# Altium PCB dAir-rose-1.0.0.0.PcbDoc
Units mm, origin at the board's own origin, x right, y up, seen from the top; angles counter-clockwise.
Board outline 93 x 93 mm, 2 copper layers (Top Layer, Bottom Layer), stack 1.671 mm thick; 77 components, 41 nets, 293 pads, 70 vias.
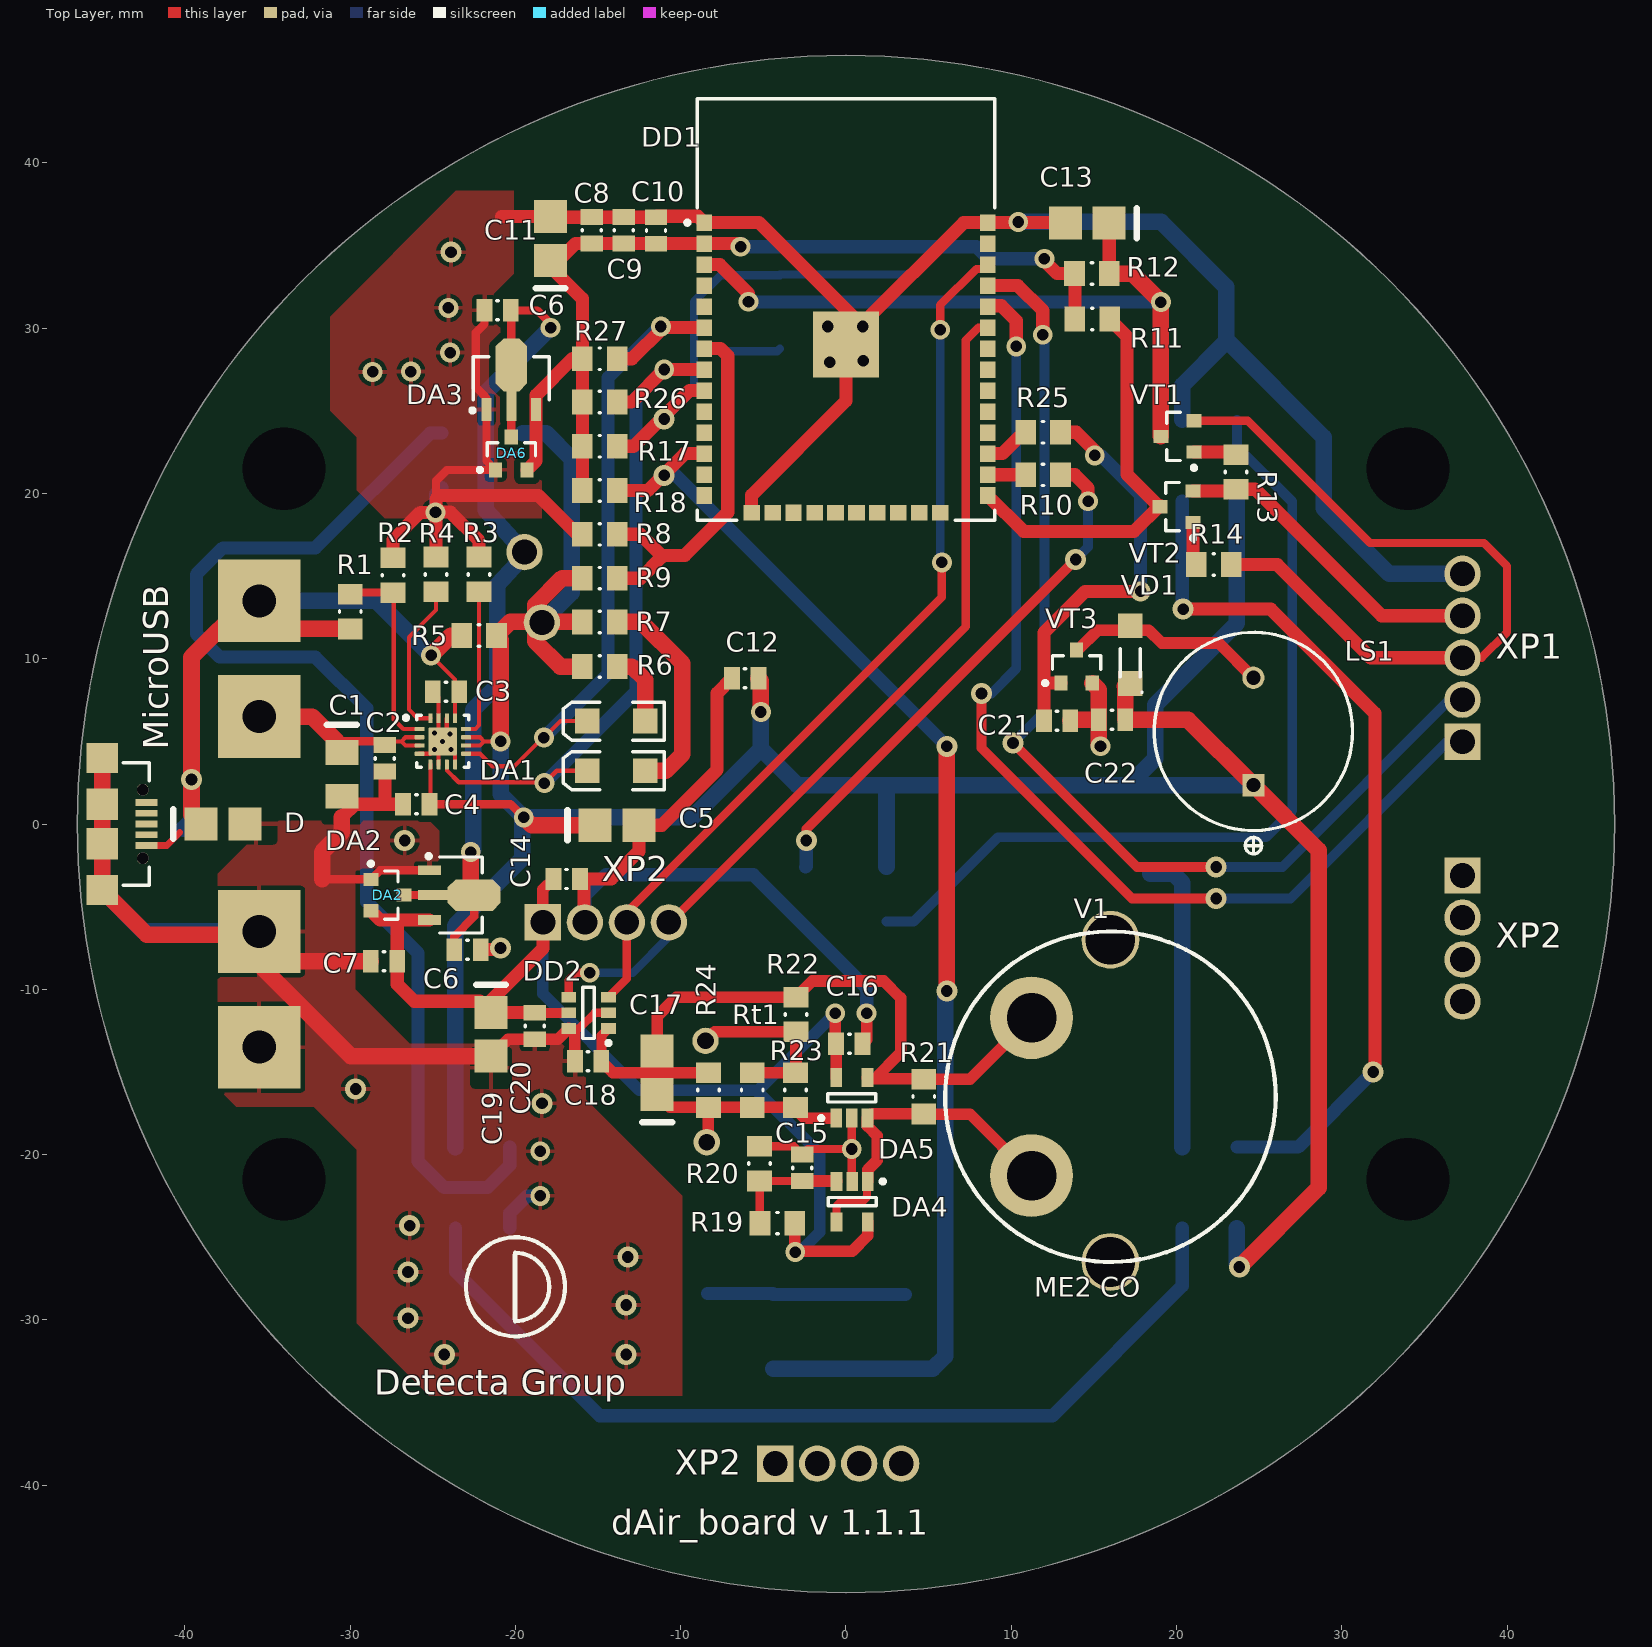
[diagram p0: Top Layer view]
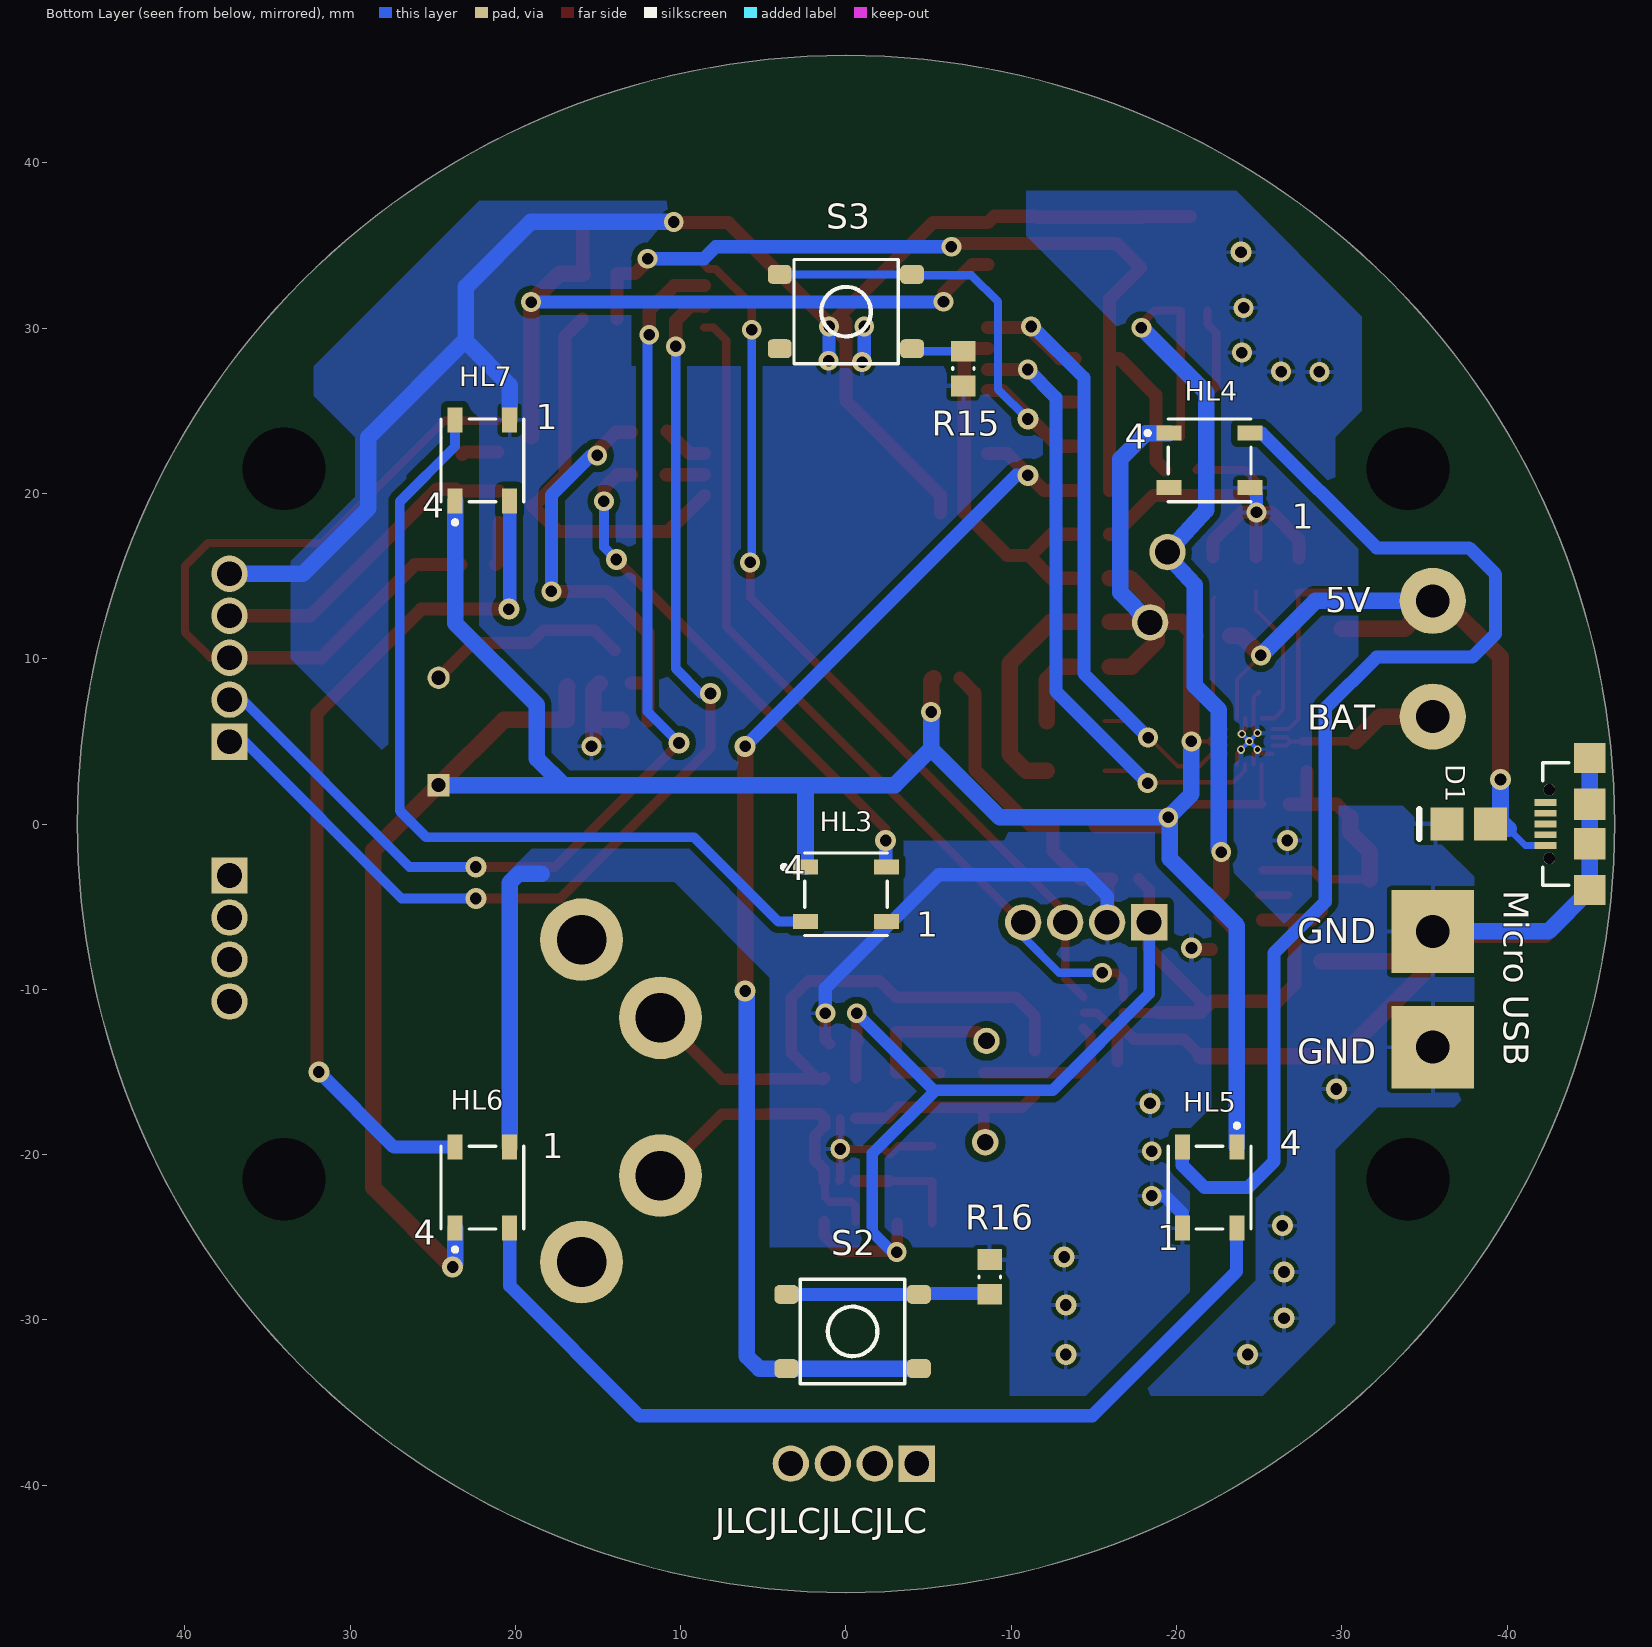
[diagram p1: Bottom Layer view, seen from below]
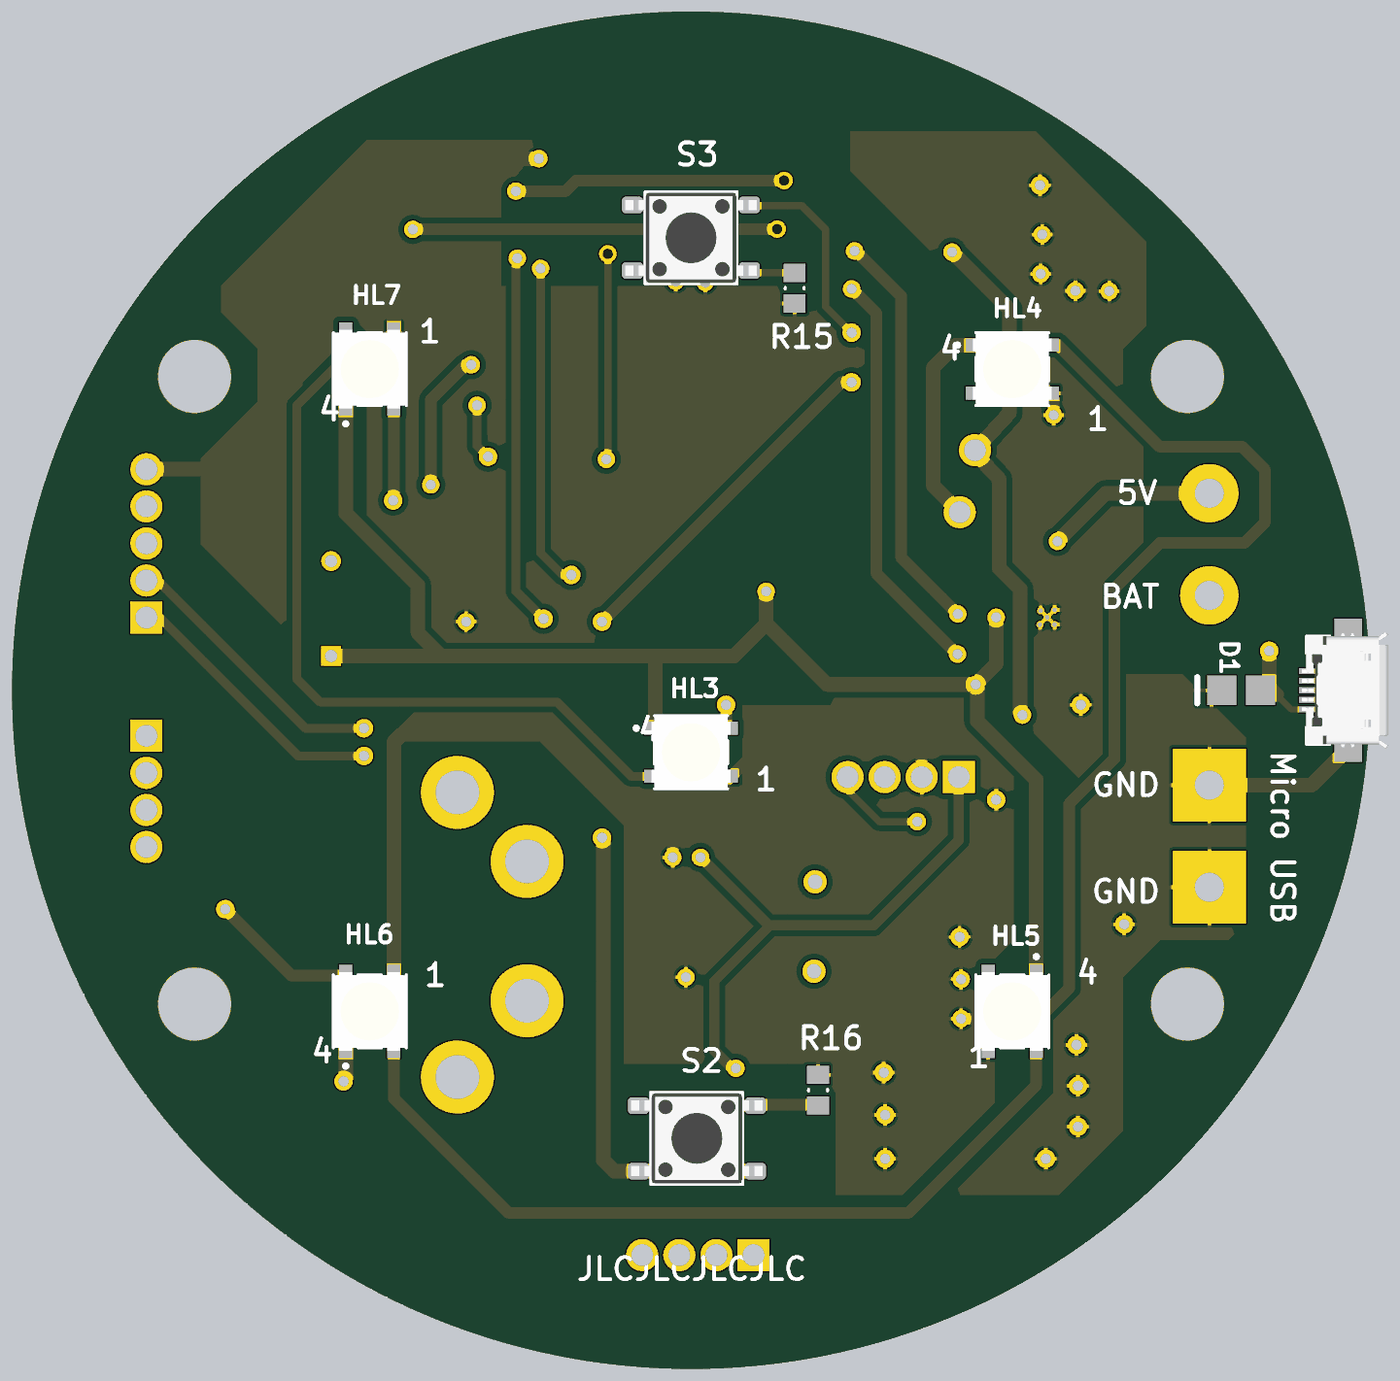
[diagram p2: 3D render of the assembled board from below, using the file's embedded part models]

## Layer stack, top to bottom
Top Solder: solder mask 0.0102, Solder Resist, Dk 3.5
Top Layer: signal copper 0.0356
Dielectric 1: dielectric 1.6, FR-4, Dk 4.8
Bottom Layer: signal copper 0.0356
Bottom Solder: solder mask 0.0102, Solder Resist, Dk 3.5

## Board outline
-46.5,0 ccw(c0,0) 0,-46.5 ccw(c0,0) 46.5,0 ccw(c0,0) 0,46.5 ccw(c0,0)

## Design rules (kind name [scope] priority, off if disabled: settings)
Clearance Polygons [InNet('GND')] p1: gap=0.4 ignorepadtopadclearanceinfootprint=FALSE
Clearance [All] p2: gap=0.254 ignorepadtopadclearanceinfootprint=FALSE
PolygonConnect [All] p1: connectstyle=Relief reliefconductorwidth=0.254 reliefentries=4 polygonreliefangle="90 Angle" airgapwidth=0.254
RoutingVias [All] p1: holewidth=0.711 width=1.27 viastyle="Through Hole" minholewidth=0.711 minwidth=1.27 maxholewidth=0.711 maxwidth=1.27
SolderMaskExpansion [All] p1: expansion=0.102
Width [All] p1: maxlimit=5 minlimit=0.2 preferedwidth=0.254
30 further rules are at their usual default settings.

## Classes and differential pairs
component class dAir: C1 C2 C4 C5 C6 C7 C8 C9 C10 C11 C12 C13 C14 C15 C16 C17 C18 C19 C20 C21 C22 DA1 DA2 DA3 DA4 DA5 DD1 DD2 HL3 HL7 LS1 R1 R2 R3 R4 R5 R6 R7 R8 R9 R10 R11 R12 R13 R14 R17 R18 R19 R20 R21 R22 R23 R24 R25 R26 R27 Rt1 V1 VD1 VT1 VT2 VT3

## Components (designator, comment, footprint, x,y, rotation, side; value= is the part's Value field where it differs from the comment)
C1 "47uF" KEMT-A-3216-18-2_M#1 -30.5,3 r270 top
C2 "4.7uF" CAPC0805(2012)155_L -27.9,3.975 r270 top
C3 "1uF" CAPC0805(2012)155_L -24.2,8 r180 top value=4.7uF
C4 "4.7uF" CAPC0805(2012)155_L -26,1.2 r180 top
C5 "47uF" KEMT-A-3216-18-2_M#2 -13.85,-0.075 r0 top
C6 "1uF" CAPC0805(2012)155_L -22.9,-7.6 r180 top value=4.7uF
C6 "1uF" CAPC0805(2012)155_L -21.075,31.075 r0 top value=4.7uF
C7 "1uF" CAPC0805(2012)155_L -27.95,-8.3 r0 top value=4.7uF
C8 "1uF" CAPC0805(2012)155_L -15.375,35.925 r270 top value=4.7uF
C9 "1nF" CAPC0805(2012)155_L -13.45,35.925 r270 top value=4.7uF
C10 "0.1uF" CAPC0805(2012)155_L -11.5,35.915 r270 top value=4.7uF
C11 "100uF" KEMT-A-3216-18-2_M#2 -17.875,35.425 r90 top
C12 "0.1uF" CAPC0805(2012)155_L -6.1,8.825 r0 top value=4.7uF
C13 "0.1uF" KEMT-A-3216-18-2_M#2 14.6,36.35 r180 top
C14 "0.1uF" CAPC0805(2012)155_L -16.9,-3.325 r180 top value=4.7uF
C15 "0.1uF" CAPC0805(2012)155_L -2.65,-20.8 r270 top value=4.7uF
C16 "1uF" CAPC0805(2012)155_L 0.2,-13.3 r0 top value=4.7uF
C17 "47uF" KEMT-A-3216-18-2_M#2 -11.425,-15.05 r90 top
C18 "0.1uF" CAPC0805(2012)155_L -15.6,-14.35 r180 top value=4.7uF
C19 "10uF" KEMT-A-3216-18-2_M#2 -21.475,-12.725 r270 top
C20 "0.1uF" CAPC0805(2012)155_L -18.825,-12.225 r90 top value=4.7uF
C21 "100 nF" CAPC0805(2012)155_L 12.775,6.25 r0 top value=4.7uF
C22 "1mF" CAPC0805(2012)155_L 16.1,6.3 r180 top value=4.7uF
D "47uF" KEMT-A-3216-18-2_M#2 -37.7,0 r0 top (schematic designator C5)
D1 "47uF" KEMT-A-3216-18-2_M#2 -37.675,0 r180 bottom (schematic designator C5)
DA1 "BQ24075" RGT0016C_V -24.4,5 r0 top
DA2 "" ONSC-SOT-23-3-318-08_V -27.75,-4.3 r0 top
DA2 "HT7530" SOT89_N -23.3,-4.3 r0 top
DA3 "HT7530" SOT89_N -20.25,26.975 r90 top
DA4 "AD8603AUJ-REEL" ADI-UJ-5_M 0.375,-22.85 r270 top
DA5 "AD8603AUJ-REEL" ADI-UJ-5_M 0.35,-16.575 r90 top
DA6 "" ONSC-SOT-23-3-318-08_V -20.25,22.425 r90 top
DD1 "ESP-WROOM-32" OLMX-ESP-WROOM-32 0,27.605 r0 top
DD2 "MCP3421A2T-E/CH" SOT-23-CH6_L -15.575,-11.425 r180 top
HL3 "WS2812B" ADAI-WS2812B_V 0,-4.25 r180 bottom
HL4 "WS2812B" ADAI-WS2812B_V -22,22 r180 bottom
HL5 "WS2812B" ADAI-WS2812B_V -22,-22 r270 bottom
HL6 "WS2812B" ADAI-WS2812B_V 22,-22 r90 bottom
HL7 "WS2812B" ADAI-WS2812B_V 22,22 r90 bottom
LS1 "KPI1410(temporally)" CZCY-CY-12085G-5042-2_V 24.65,5.6 r90 top
"Micro USB" "Comment" 629105136821 -45,0 r90 bottom
MicroUSB "Comment" 629105136821 -45,0 r270 top
R1 "1k" RESC0805(2012)_M -30,12.85 r90 top value="4.30 Ohm"
R2 "1k" RESC0805(2012)_M -27.4,15.05 r90 top value="4.30 Ohm"
R3 "1k" RESC0805(2012)_M -22.2,15.1 r90 top value="4.30 Ohm"
R4 "1k" RESC0805(2012)_M -24.8,15.1 r90 top value="4.30 Ohm"
R5 "0" RESC0805(2012)_M -22.2,11.4 r180 top value="4.30 Ohm"
R6 "1k" RESC0805(2012)_M -14.9,9.525 r0 top value="4.30 Ohm"
R7 "1k" RESC0805(2012)_M -14.9,12.225 r0 top value="4.30 Ohm"
R8 "470k" RESC0805(2012)_M -14.9,17.525 r0 top value="4.30 Ohm"
R9 "100k" RESC0805(2012)_M -14.9,14.875 r180 top value="4.30 Ohm"
R10 "470" RESC0805(2012)_M 11.925,21.125 r180 top value="4.30 Ohm"
R11 "10k" RESC0805(2012)_M 14.9,30.55 r180 top value="4.30 Ohm"
R12 "10k" RESC0805(2012)_M 14.875,33.3 r180 top value="4.30 Ohm"
R13 "10k" RESC0805(2012)_M 23.6,21.3 r270 top value="4.30 Ohm"
R14 "10k" RESC0805(2012)_M 22.25,15.7 r0 top value="4.30 Ohm"
R15 "470" RESC0805(2012)_M -7.1,27.55 r270 bottom value="4.30 Ohm"
R16 "470" RESC0805(2012)_M -8.7,-27.4 r90 bottom value="4.30 Ohm"
R17 "47k" RESC0805(2012)_M -14.9,22.85 r180 top value="4.30 Ohm"
R18 "47k" RESC0805(2012)_M -14.9,20.175 r180 top value="4.30 Ohm"
R19 "1M" RESC0805(2012)_M -4.15,-24.15 r0 top value="4.30 Ohm"
R20 "150k" RESC0805(2012)_M -5.225,-20.55 r270 top value="4.30 Ohm"
R21 "200" RESC0805(2012)_M 4.7,-16.5 r90 top value="4.30 Ohm"
R22 "120k" RESC0805(2012)_M -3.025,-11.525 r270 top value="4.30 Ohm"
R23 "100k" RESC0805(2012)_M -3.05,-16.1 r270 top value="4.30 Ohm"
R24 "100" RESC0805(2012)_M -8.325,-16.1 r90 top value="4.30 Ohm"
R25 "470" RESC0805(2012)_M 11.925,23.7 r180 top value="4.30 Ohm"
R26 "47k" RESC0805(2012)_M -14.9,25.525 r0 top value="4.30 Ohm"
R27 "47k" RESC0805(2012)_M -14.9,28.15 r0 top value="4.30 Ohm"
Rt1 "47k" RESC0805(2012)_M -5.675,-16.1 r270 top value="4.30 Ohm"
S2 "Comment" DIPT-DTSM-6_V -0.4,-30.7 r180 bottom
S3 "Comment" DIPT-DTSM-6_V 0,31 r0 bottom
V1 "ME2 CO" "ME2 CO" 16,-16.5 r315 top locked
VD1 "LL4148" INF-SOD323_V 17.2,9.75 r180 top
VT1 "bc847" ONSC-SOT-23-3-318-08_V 20.05,23.45 r180 top
VT2 "bc847" ONSC-SOT-23-3-318-08_V 20,19.2 r180 top
VT3 "" ONSC-SOT-23-3-318-08_V 13.95,9.525 r90 top

## Footprints (in the part's own frame and the unit in brackets; to place one, negate y for a bottom-side part, rotate by r counter-clockwise, add the part's x,y. Pads: shape width x height; smd on the part's side, far side on the other; paste and mask are expansions set on the pad)
629105136821 [mm] "Micro USB 2.0 SMT Type B Horizontal 5 Contacts"
  rect 0.4x1.35 smd: 1(-1.3,2.675) 2(-0.65,2.675) 3(0,2.675) 4(0.65,2.675) 5(1.3,2.675)
  round 0.7 hole 0.7 unplated: MH1(-2.075,2.45) MH2(2.075,2.45)
  rect 1.8x1.9 smd: Shell(-4,0) Shell(4,0)
  rect 1.9x1.9 smd: Shell(-1.2,0) Shell(1.2,0)
  silkscreen extent -3.7,1.25 3.7,2.85, body extent -4,-2.73 4,3.17, height 2.69
ADAI-WS2812B_V [mm] "SMD, 4-Leads, Body 5x5mm, Pitch 3.3mm"
  rect 1.5x0.9 smd: 1(-2.45,1.65) 2(-2.45,-1.65) 3(2.45,-1.65) 4(2.45,1.65)
  silkscreen extent -3.88,-2.5 2.5,2.5, body extent -2.7,-2.5 2.7,2.5, height 1.69
ADI-UJ-5_M [mm] "SOT23, 5-Leads, Body 2.9x1.6mm, Pitch 0.95mm, IPC Low Density"
  rect 1.15x0.7 smd: 1(-1.225,0.95) 2(-1.225,0) 3(-1.225,-0.95) 4(1.225,-0.95) 5(1.225,0.95)
  silkscreen extent -1.35,-1.45 0.25,1.98, body extent -0.8,-1.45 0.8,1.45, height 1
CAPC0805(2012)155_L [mm] "Chip Capacitor, Body 2.0x1.2mm, Height 1.55mm, IPC High Density"
  rect 0.95x1.35 smd: 1(-0.8,0) 2(0.8,0)
  silkscreen extent -0.05,-0.57 0.05,0.57, body extent -1.1,-0.72 1.1,0.72, height 1.55
CZCY-CY-12085G-5042-2_V [mm] "Through-hole Buzzer, 2-Leads, Dia 12mm, Height 8.5mm"
  rect 1.35x1.35 hole 0.85: 1(-3.25,0)
  round 1.35 hole 0.85: 2(3.25,0)
  Mechanical 13 keep-out circle w0.1: c0,0 r6
  silkscreen extent -7.41,-6 6,6, body extent -6,-6 6,6, height 8.5
DIPT-DTSM-6_V [mm] "Switch, Through-Hole, 4 Leads, Body 8.5x8.5mm, Row Spacing 9.0mm, Pitch 4.5mm"
  rrect50% 1.448x1.143 smd: 1(4.01,-2.25) 2(-4,-2.25) 3(4.01,2.24) 4(-4,2.24)
  silkscreen extent -3.16,-3.16 3.15,3.15, body extent -4.5,-3.1 4.5,3.1, height 4.5
INF-SOD323_V [mm] "SOD, 2-Leads, Body 1.7x1.25 mm"
  rect 1.5x1.5 smd: 1(0,1.25) 2(0,-2.25)
  silkscreen extent -0.76,-0.85 0.6,1.83, body extent -0.63,-0.85 0.63,0.85, height 1.1
KEMT-A-3216-18-2_M#1 [mm] "Molded TAN Capacitor, 2-Leads, Body 3.4x1.8mm, IPC Low Density"
  rect 1.5x2 smd: 1(-1.325,0) 2(1.325,0)
  silkscreen extent -3,-0.9 -3,0.9, body extent -1.7,-0.9 1.7,0.9, height 1.8
KEMT-A-3216-18-2_M#2 [mm] "Molded TAN Capacitor, 2-Leads, Body 3.4x1.8mm, IPC Low Density"
  rect 2x2 smd: 1(-1.325,0) 2(1.325,0)
  silkscreen extent -3,-0.9 -3,0.9, body extent -1.7,-0.9 1.7,0.9, height 1.8
"ME2 CO" [mm]
  round 5 hole 3: 1(-6.75,0) 2(0,-6.75)
  silkscreen extent -10,-10 10,10
OLMX-ESP-WROOM-32 [mm] "SMD, 38-Leads, Body 18x25.5mm, Pitch 1.27mm"
  rect 0.95x1 smd: 1(-8.575,8.78) 2(-8.575,7.51) 3(-8.575,6.24) 4(-8.575,4.97) 5(-8.575,3.7) 6(-8.575,2.43) 7(-8.575,1.16) 8(-8.575,-0.11) 9(-8.575,-1.38) 10(-8.575,-2.65) 11(-8.575,-3.92) 12(-8.575,-5.19) 13(-8.575,-6.46) 14(-8.575,-7.73) 17(-3.175,-8.78) 25(8.575,-7.73) 26(8.575,-6.46) 27(8.575,-5.19) 28(8.575,-3.92) 29(8.575,-2.65) 30(8.575,-1.38) 31(8.575,-0.11) 32(8.575,1.16) 33(8.575,2.43) 34(8.575,3.7) 35(8.575,4.97) 36(8.575,6.24) 37(8.575,7.51) 38(8.575,8.78)
  rect 4x4 smd: 1(0,1.395)
  rect 1x0.95 smd: 15(-5.715,-8.78) 16(-4.445,-8.78) 18(-1.905,-8.78) 19(-0.635,-8.78) 20(0.635,-8.78) 21(1.905,-8.78) 22(3.175,-8.78) 23(4.445,-8.78) 24(5.715,-8.78)
  silkscreen extent -9.72,-9.23 9,16.27, body extent -9.04,-9.25 9.04,16.29, height 3.04
ONSC-SOT-23-3-318-08_V [mm] "SOT23, 3-Leads, Body 2.92x1.3mm, Pitch 0.95mm"
  rect 0.9x0.8 smd: 1(-1,0.95) 2(-1,-0.95) 3(1,0)
  silkscreen extent -1.12,-1.46 0.65,2.02, body extent -0.65,-1.46 0.65,1.46, height 1.11
RESC0805(2012)_M [mm] "Chip Resistor, Body 2.0x1.3mm, IPC Low Density"
  rect 1.25x1.5 smd: 1(-1.05,0) 2(1.05,0)
  silkscreen extent -0.05,-0.65 0.05,0.65, body extent -1.1,-0.67 1.1,0.67, height 0.7
RGT0016C_V [mm] "QFN, 16-Leads, Body 3x3mm, Pitch 0.5mm, Thermal Pad 1.65x1.65mm"
  rrect40% 0.6x0.25 smd: 1(-1.4,0.75) 2(-1.4,0.25) 3(-1.4,-0.25) 4(-1.4,-0.75) 9(1.4,-0.75) 10(1.4,-0.25) 11(1.4,0.25) 12(1.4,0.75)
  rrect40% 0.25x0.6 smd: 5(-0.75,-1.4) 6(-0.25,-1.4) 7(0.25,-1.4) 8(0.75,-1.4) 13(0.75,1.4) 14(0.25,1.4) 15(-0.25,1.4) 16(-0.75,1.4)
  rrect6% 1.7x1.7 smd paste-0.85: 17(0,0)
  rrect6% 1.55x1.55 on Top Paste: 17(0,0)
  silkscreen extent -2.35,-1.58 1.57,1.58, body extent -1.5,-1.5 1.5,1.5, height 1
SOT89_N [mm] "SOT89, 3-Leads, Body 4.5x2.4 mm, Pitch 1.5mm, Lead Span 4.1mm, IPC Medium Density"
  rect 1.4x0.6 smd: 1(-1.9,1.5) 3(-1.9,-1.5)
  rect 1.8x0.6 smd: 2(-1.7,0)
  oct 3.2x1.9 smd: 2(0.8,0)
  silkscreen extent -2.07,-2.3 1.3,2.47, body extent -1.3,-2.3 1.29,2.3, height 1.6
SOT-23-CH6_L [mm] "SOT23, 6-Leads, Body 2.9x1.7mm, Pitch 0.95mm, Lead Span 2.8mm, IPC High Density"
  rect 0.9x0.65 smd: 1(-1.2,0.95) 2(-1.2,0) 3(-1.2,-0.95) 4(1.2,-0.95) 5(1.2,0) 6(1.2,0.95)
  silkscreen extent -1.33,-1.55 0.35,1.95, body extent -0.9,-1.55 0.9,1.55, height 1.45

## Part data
C1 C5 C11 C13 C17 C19 D D1: library part CMP-2000-05172-1, Capacitance=10µF, ESR (Equivalent Series Resistance)=3.8Ohm, Lifetime @ Temp.=2000Hrs@85degC, Manufacturer=Kemet, Manufacturer Size Code=A, Operating Temperature=-55degC~125degC, Package / Case=1206(3216Metric), Package Description="2-Pin Surface Mount Device, Body 3.2 x 1.6 mm", Package Reference=1206, Standard Package=2,000, Tolerance=±10%, Voltage - Rated=10V, Catalog Drawings=T49x,T5xxSeries_A-side1T49x,T5xxSeries_A,B-side2T49x,T5xxSeries_A,SBottom, Category=Capacitors, Datasheet URL=http://www.farnell.com/datasheets/1824869.pdf, Datasheet Version=Apr-14, Family=TantalumCapacitors, Features=GeneralPurpose, Height - Seated (Max)="0.071\"(1.80mm)", Lead Spacing=-, Manufacturer URL=http://www.kemet.com/, Mounting Type=SurfaceMount, Online Catalog=T491Series, Other Names=399-3684-2, Packaging=Tape&Reel(TR), Product Training Modules=CapacitorBasics-TypicalUsesforCapacitorsDeratingGuidelinesforSurfaceMountTantalumCapacitors, Series=T491, Size / Dimension="0.126\"Lx0.063\"W(3.20mmx1.60mm)", Type=Molded
C2 C3 C4 C6 C6 C7 C8 C9 C10 C12 C14 C15 C16 C18 C20: library part CMP-1036-04882-1, "CAP 4.7uF 10V ±10% 0805 (2012 Metric) Thickness 1.55mm SMD", Case-EIA=0805, Case-Metric=2012, Rated Voltage="10 V", Tolerance=A±10%, Max Thickness="1.55 mm", Technology=SMT
C21 C22: library part CMP-1036-04882-1, "CAP 4.7uF 10V ±10% 0805 (2012  Thickness 1.55mm SMD", Case-EIA=0805, Case-Metric=2012, Rated Voltage="10 V", Tolerance=A±10%, Max Thickness="1.55 mm", Technology=SMT
DA1: library part CMP-0321-00238-2, "USB-Friendly Li-Ion Battery Charger and Power-Path Management IC, Vout 5.5 V, 4.3 V, -40 to 85 degC, 16-pin QFN (RGT), Green (RoHS & no Sb/Br)", Manufacturer="Texas Instruments", Over Voltage Protection=N, PartNumber=BQ24075RGTR, Code_JEDEC=MO-220, ComponentLink1Description=Datasheet, ComponentLink1URL=http://www.ti.com/general/docs/lit/getliterature.tsp?genericPartNumber=BQ24075&fileType=pdf, DatasheetVersion=SLUS810G, Eco-Plan="Green (RoHS & no Sb/Br)", Lead Acid=N, Li-Ion=N, Li-Polymer=N, Mounting Technology="Surface Mount", NiCd=N, NiMH=N, PackageDescription="16-Pin Plastic Quad Flat No-Lead, 3 x 3 mm Body, 0.5 mm Pitch, 1.7 x 1.7 mm Exposed Pad", PackageReference=RGT0016C, PackageVersion="revH, Oct-2011", SubFamily="Battery Charge Management", Vin(Min)(V)=4.3
DA2 DA6 VT1 VT2 VT3: library part CMP-1048-00737-1, "General Purpose Transistor, NPN Silicon, 3-Pin SOT-23, Pb-Free, Tape and Reel", Manufacturer="On Semiconductor", PartNumber=BC817-25LT1G, ComponentLink1Description="Manufacturer URL", ComponentLink1URL=http://www.onsemi.com/, ComponentLink2Description=Datasheet, ComponentLink2URL=http://www.onsemi.com/pub_link/Collateral/BC817-16LT1-D.PDF, ComponentLink3Description="Package Specification", ComponentLink3URL=http://www.onsemi.cn/pub_link/Collateral/318-08.PDF, DatasheetVersion="Rev. 12", fT Min (MHz)=100, IC Continuous (A)=0.5, Mounting Technology="Surface Mount", PackageDescription="3-Pin Small Outline Transistor, Body 2.92 x 1.3 mm, Pitch 0.95 mm", PackageReference=SOT-23-3-318-08, PackageVersion="Rev. AP, 11/2009", Packing="Tape and Reel", Polarity=NPN, RoHS=TRUE
DA2 DA3: library part CMP-0204-00106-1, "100mA Low Power LDO, Output Voltage 3.0V, SOT89 Pkg", Code_IPC=SOT89, DatasheetVersion="Rev1.80, Mar-2010", PackageDescription="3-Pin SOT-89 Package 1.5 mm Pitch, 4.1 mm Lead Span", PackageReference=SOT89, PackageVersion=May-2010
DA4 DA5: library part CMP-0384-02070-2, "Single Channel Single-Supply Operation Operational Amplifier, 400 KHz BW, 100 mV/us SR, Industrial, 5-pin SOT23 (UJ-5), Reel", Amplifiers Per Package=1, Generic Part Number=AD8603, Input Bias Current=200fA, Input Offset Voltage=12uV, Manufacturer="Analog Devices", Code_JEDEC=MO-193-AB, ComponentLink1Description="Manufacturer URL", ComponentLink1URL=http://www.analog.com/en/index.html, ComponentLink2Description=Datasheet, ComponentLink2URL=http://www.analog.com/static/imported-files/data_sheets/AD8603_8607_8609.pdf, ComponentLink3Description="Package Specification", ComponentLink3URL=http:/www.analog.com/static/imported-files/packages/PKG_PDF/TSOT(UJ)/UJ_5.pdf, ComponentLink4Description="Reference Circuit", ComponentLink4URL=http://www.analog.com/en/all-operational-amplifiers-op-amps/operational-amplifiers-op-amps/ad8603/products/product.html#product-recommendations, DatasheetVersion="Rev. C", Iq/Amp=50uA, Mounting Technology="Surface Mount", PackageDescription="5-Pin Thin Small Outline Transistor Package, Body 2.9 x 1.6 mm, Pitch 0.95 mm", PackageReference=UJ-5, PackageVersion=100708-A, PartNumber=AD8603AUJ-REEL, RevisionNote="Reference Circuit URL fixed", Slew Rate=100mV/us, Small Signal Bandwidth=400KHz, V Span Max=6V, V Span Min=1.8V
DD1: library part CMP-2000-07454-1, "Espressif System, 2.7 to 3.6 V, -40 to 85 degC, 38-Pin SMD", Manufacturer=Olimex, Package Description="38-Pin Surface Mount Device, Body 18 x 25.5 mm, Pitch 1.27 mm", Datasheet URL=http://www.espressif.com/sites/default/files/documentation/esp-wroom-32_datasheet_en.pdf, Datasheet Version="Rev. 2.1, 09/2017", Manufacturer URL=https://www.olimex.com, Mounting Technology=SurfaceMount, Package Reference=ESP-WROOM-32, RoHSCompliant=false
DD2: library part CMP-0188-00097-2, "18-Bit Analog-to-Digital Converter with I2C Interface and On-Board Reference, 6-Pin SOT-23, Extended Temperature, Tape and Reel", Code_IPC=SOT26A-6, ComponentLink1Description="Manufacturer URL", ComponentLink1URL=http://www.microchip.com/, ComponentLink2Description=Datasheet, ComponentLink2URL=http://ww1.microchip.com/downloads/en/DeviceDoc/22003e.pdf, ComponentLink3Description="Package Specification", ComponentLink3URL=http://www.microchip.com/stellent/groups/techpub_sg/documents/packagingspec/en012702.pdf, DatasheetVersion="revE, Aug-2009", PackageDescription="6-Lead Plastic Small Outline Transistor (CH) [SOT-23]", PackageReference=SOT-23-CH6, PackageVersion="revBB, Aug-2009", RevisionNote="URLs added."
HL3 HL4 HL5 HL6 HL7: library part CMP-1740-00005-1, "Intelligent Control LED Integrated Light Source, 3.5 to 5.3 V, -25 to 80 degC, 4-Pin SMD, RoHS, Bulk", Case\Package=Radial, Current Rating="240 mA", Max Operating Temperature="125 degC", Min Operating Temperature="-55 degC", Package Quantity=200, Tolerance=10%, ComponentLink1Description="Manufacturer URL", ComponentLink1URL=https://www.adafruit.com/, ComponentLink2Description=Datasheet, ComponentLink2URL=https://cdn-shop.adafruit.com/datasheets/WS2812B.pdf, DatasheetVersion=May-13, Height="12.2 mm", Lead Pitch="5 mm", Length="12.2 mm", Mount="Through Hole", PackageDescription="4-Pin Surface Mount Device, Body 5 x 5 mm, Pitch 3.3 mm", PackageReference=WS2812B, Packaging=Bulk, Pins=2, Radiation Hardening=No, REACH SVHC="No SVHC", RoHSCompliant=true, Shielding=Unshielded
LS1: library part CMP-1019-00001-1, "Buzzer, 5 V, 42 Ohm, -20 to 70 degC, 2-Pin THD, Dia 12 mm, Height 8.5 mm, RoHS, Tray", Current Consumption (Max.)="35 mA", Manufacturer="Changzhou Chaoyin", Operating Temperature Range="-20 to 70 degC", Oscillation Frequency="2.048 KHz", PartNumber=cy-12085G-5042, Rated Voltage="5 V", Resistance Value="42 +/- 4 Ohm", Mounting Technology="Through Hole", PackageDescription="2-Pin Through-hole Buzzer, Dia 12 mm, Height 8.5 mm", PackageReference=CY-12085G-5042, Packing=Tray, RoHS=TRUE, Sound Pressure Level (Min.)="85 dB"
R1 R2 R3 R4 R5 R6 R7 R8 R9 R10 R11 R12 R13 R14 R15 R16 R17 R18 R19 R20 R21 R22 R23 R24 R25 R26 R27 Rt1: library part CMP-1013-00017-1, Case-EIA=0805, Case-Metric=2012, Power="0.125 W", Tolerance="5 %", Technology=SMT
VD1: library part CMP-1182-00006-1, "Silicon Schottky Diode, SOD323, Reel, Green", Manufacturer=Infineon, PartNumber="BAT 54-03W E6327", ComponentLink1Description="Manufacturer URL", ComponentLink1URL=http://www.infineon.com/, ComponentLink2Description=Datasheet, ComponentLink2URL=http://www.infineon.com/dgdl/bat54series.pdf?folderId=db3a30431400ef68011425f1ca2505e3&fileId=db3a304314dca3890115190b74210ea6, ComponentLink3Description="Package Specification", ComponentLink3URL=http://www.infineon.com/dgdl/SOD323-Package_Overview.pdf?folderId=db3a30431936bc4b011952aab84f3bbe&fileId=db3a30431936bc4b011952beed653be3, Green=TRUE, Mounting Technology="Surface Mount", PackageDescription="2-Pin Small Outline Diode Package, 1.25 x 1.7 mm Body", PackageReference=SOD323, Packing=Reel, RevisionNote="Lost Devices pt2"

## Free pads (board coordinates)
  rect 5x5 hole 2: 1(-35.5,-13.5) 2(-35.5,-6.5)
  rect 2.2x2.2 hole 1.5: 1(-18.34,-5.95) 1(-4.28,-38.7) 1(37.3,-3.12) 1(37.3,4.98)
  rect 1.5x1.5 smd: 1(-12.15,3.225) 1(-12.15,6.225) 2(-15.65,3.225) 2(-15.65,6.225)
  rect 5x5 / inner round 4 / far side round 4 hole 2: 2(-35.5,6.5) 2(-35.5,13.5)
  round 2.2 hole 1.5: 2(-15.8,-5.95) 2(-1.74,-38.7) 2(37.3,-5.66) 2(37.3,7.52) 3(-13.26,-5.95) 3(0.8,-38.7) 3(37.3,-8.2) 3(37.3,10.06) 4(-10.72,-5.95) 4(3.34,-38.7) 4(37.3,-10.74) 4(37.3,12.6) 5(37.3,15.14) 13(-18.4,12.2) 14(-19.45,16.45)
  round 0 hole 5: 9(-34,-21.5) 9(-34,21.5) 9(34,-21.5) 9(34,21.5)
  round 1.6 hole 1: 15(-8.425,-19.25) 16(-8.5,-13.125)
  round 3.5 / inner round 5 / far side round 5 hole 3: 21(16,-26.5) 21(16,-7)

## Via types
v1: diameter 1.2, hole 0.7, Top Layer to Bottom Layer, 39 vias
v2: diameter 1.27, hole 0.711, Top Layer to Bottom Layer, 26 vias
v3: diameter 0.5, hole 0.3, Top Layer to Bottom Layer, 5 vias

## Nets (pads, with @x,y where several pads share a name; then routed paths per layer and width w, separated by ;. In a path a pad name is that pad's centre, name@x,y a point inside that pad or via, vN(x,y) a via of type N, cw(c..) or ccw(c..) an arc to the next point about the centre after c; other vN are vias at no path point)
3V: C7.2 C14.2 C16.1 C19.1 C20.2 DA2.2@-28.75,-5.25 DA2.3@-25.2,-5.8 DA4.5 DA5.5 DD2.5 pad.1@-18.34,-5.95 R19.2 | length 78.2
  Top Layer w0.6: C20.2@-18.85,-11.4 C20.2 DD2.5
  Top Layer w0.7: pad.1@-18.34,-5.95 -18.34,-3.965 C14.2 ; R19.2 -3.1,-25.85 0.375,-25.85 1.325,-24.9 DA4.5 ; v1(-0.65,-11.451) -0.65,-13.1 -0.725,-13.175 C16.1 DA5.5
  Top Layer w0.8: DA2.2@-28.75,-5.25 -28.2,-5.8 -27.15,-5.8 ; DA2.3@-25.2,-5.8 -27.15,-5.8 ; C20.2@-18.85,-11.4 C19.1 ; pad.1@-18.34,-5.95 -18.34,-7.54 -21.475,-10.675 C19.1 ; -27.15,-5.8 C7.2 -27.15,-9.7 -26.125,-10.725 -22.15,-10.725 C19.1
  Bottom Layer w0.7: pad.1@-18.34,-5.95 -18.34,-10.26 -12.5,-16.1 -5.362,-16.1 ; v1(-3.075,-25.9) -2.8,-25.9 -1.6,-24.7 -1.6,-19.925 -5.362,-16.163 v1(-0.65,-11.451)
5V: "Micro USB.1" C3.1 D1.2 D.1 DA1.13 MicroUSB.5 pad.2@-35.5,13.5 R1.1 R5.2 | length 48
  Top Layer w0.254: v1(-25.1,10.2) -23.65,8.75 DA1.13
  Top Layer w0.4: MicroUSB.5 -41.1,-1.3 -40.3,-0.5
  Top Layer w1: D.1@-39.6,0.575 v2(-39.6,2.7) -39.6,10.1 -36.2,13.5 -35.5,13.5 -33.8,11.8 R1.1 ; v1(-25.1,10.2) -23.9,11.4 R5.2
  Bottom Layer w0.4: -42.325,-1.3 -41.1,-1.3 -40.1,-0.3
  Bottom Layer w1: -40.1,-0.3 -39.6,0.2 v2(-39.6,2.7) ; pad.2@-35.5,13.5 -28.4,13.5 v1(-25.1,10.2)
+E: C4.1 C5.1 C12.2 C22.1 DA1.5 DA1.10 DA1.11 HL3.1 HL4.1 HL5.1 HL6.1 HL7.1 LS1.1 pad.13 R5.1 R6.1 R7.1 R9.2 VD1.1 | length 201.6
  Top Layer w0.25: C4.1 -25.15,1.25 DA1.5 ; DA1.10@-23,4.757 -22.143,4.757 -21.9,5 ; DA1.11 -22.15,5.25 -21.9,5 ; v1(-20.9,5) -21.9,5
  Top Layer w0.5: C4.1 -20.3,1.2 v1(-19.5,0.4) v1@-19.5,0.05
  Top Layer w1: v1(-20.9,5) -20.9,11.15 R5.1 -20.325,12.225 pad.13@-18.8,12.225 ; v1(-19.5,0.4) -19.025,-0.075 C5.1 ; R6.1 -17.275,9.525 -18.8,11.05 pad.13@-18.8,12.225 ; R7.1 pad.13@-18.8,12.225 ; R9.2 -17.175,14.875 -18.8,13.25 pad.13@-18.8,12.225 ; C12.2 -5.15,8.675 v1(-5.15,6.775) ; VD1.1@16.875,8.325 16.9,8.3 C22.1 20.7,6.3 LS1.1 28.6,-1.6 28.6,-22 v2(23.8,-26.8)
  Bottom Layer w1: HL5.1 -23.65,-6.15 -19.6,-2.1 -19.6,0.5 -20.9,1.8 v1(-20.9,5) ; HL4.1 -18.15,23.65 -16.6,22.1 -16.6,14 pad.13 ; v1(-19.5,0.4) -9.3,0.4 -5.15,4.55 ; v1(-5.15,6.775) -5.15,4.55 ; HL3.1 2.45,2.3 2.5,2.35 ; HL6.1 23.65,-26.65 v2(23.8,-26.8) ; HL7.1 23.65,12.15 18.7,7.2 18.7,3.95 17.1,2.35 ; LS1.1 17.1,2.35 ; -5.15,4.55 -2.95,2.35 2.5,2.35 ; 2.5,2.35 17.1,2.35
GND: "Micro USB.Shell" C1.2 C2.2 C3.2 C4.2 C5.2 C6.1 C7.1 C8.1 C9.1 C10.1 C11.2 C12.1 C13.2 C14.1 C15.1 C16.2 C18.2 C19.2 C20.1 C21.2 C22.2 D1.1 D.2 DA1.4 DA1.6 DA1.8 DA1.14 DA1.15 DA1.17@-24.4,5 DA2.1 DA3.1 DA4.2 DA5.2 DA6.1 DD1.1 DD1.15 DD1.38 DD2.2 DD2.6 HL3.3 HL4.3 HL5.3 HL6.3 HL7.3 pad.1@-35.5,-13.5 pad.2@-15.8,-5.95 pad.2@-35.5,-6.5 pad.5 R2.2 R3.2 R4.2 R8.1 R15.2 R16.2 R20.1 VT3.2 | length 308.3
  Top Layer w0.256: DA1.4 -25.15,4.25 v3(-24.9,4.5) -24.65,4.25 DA1.6 ; C3.2 -24.65,7.65 DA1.15 -24.65,5.75 v3(-24.9,5.5) ; DA1.14 -24.15,5.75 -23.95,5.55 v3(-23.95,5.45) ; v3(-23.9,4.5) -23.65,4.25 DA1.8
  Top Layer w0.5: -31.7,-3.35 -28.75,-3.35 -28.2,-2.8 DA2.1@-25.2,-2.8 ; -24.813,19.637 -24.813,20.762 -24.15,21.425 DA6.1 -21.75,21.975 DA3.1 -21.75,25.775 -22.4,26.425 -22.4,29.725 -21.875,30.25 C6.1@-21.875,31.075 ; DD2.6 -16.15,-12.375 -15.2,-11.425 DD2.2 ; R20.1 -3.15,-19.5 C15.1 -2.313,-19.663 v1(0.35,-19.663) ; DA5.2 v1(0.35,-19.663) ; DA4.2@0.425,-21.6 0.35,-21.525 v1(0.35,-19.663)
  Top Layer w0.7: C19.2 -20.45,-13.025 C20.1 -17.425,-13.025 DD2.6 -16.4,-12.75 C18.2 ; C16.2 1.25,-13.05 v1(1.25,-11.45)
  Top Layer w0.8: -30.5,0.4 -29.7,1.2 -27.85,1.2 ; C2.2 -27.9,1.25 -27.85,1.2 ; R2.2 -27.4,17.2 -25.75,18.85 v1(-24.837,18.85) v1@-24.813,18.875 ; C4.2 -27.85,1.2 ; R4.2 v1@-24.8,18.813 ; R3.2 -22.2,17.125 -23.95,18.875 v1@-24.813,18.875 ; C6.1@-22.1,-7.6 -21,-7.6 v2(-20.9,-7.5) ; -20.85,36.75 C11.2 -17.84,36.715 C10.1 ; R8.1 -16.25,17.525 -18.6,19.875 -24.575,19.875 -24.813,19.637 v1@-24.813,18.875 ; pad.2@-15.8,-5.95 -15.85,-5.9 -15.85,-3.575 C14.1 -14.2,-3.325 -12.525,-1.65 C5.2 -11.15,-0.075 -7.8,3.275 -7.8,7.925 C12.1 ; C10.1@-11.5,36.7 -11.425,36.775 -8.965,36.775 -8.575,36.385 -5.26,36.385 DD1.1@0.925,30.2 ; DD1.15 -5.715,19.885 0,25.6 0,29 DD1.1@0,29.275 ; DD1.1@0,30.4 DD1.1@0,29.275 ; v1(1.025,30.1) DD1.1@0.925,30.2 ; C13.2 13.24,36.385 DD1.38 7.11,36.385 DD1.1@0.925,30.2 ; DD1.1@0,29.275 DD1.1@0.925,30.2
  Top Layer w1: -31.7,-3.35 -31.7,-1.7 -30.5,-0.5 -30.5,0.4 ; C7.1 -35.3,-8.3 -35.5,-8.5 -29.95,-14.05 C19.2 ; C21.2 13.625,6.3 C22.2 ; VT3.2 15.3,8.125 C22.2 ; v1(15.4,4.7) 15.3,4.8 C22.2
  Bottom Layer w0.256: v3(-24.9,4.5) v3(-24.4,5) ; v3(-24.9,5.5) v3(-24.4,5) ; v3(-23.95,5.45) v3(-24.4,5) ; v3(-23.9,4.5) v3(-24.4,5)
  Bottom Layer w0.8: v1(-24.837,18.85) -24.837,19.962 HL4.3 ; HL5.3 -20.35,-23.55 -19.3,-22.5 v1(-18.5,-22.5) ; pad.2@-15.8,-5.95 -15.8,-4.35 -14.525,-3.075 -5.6,-3.075 1.25,-9.925 v1(1.25,-11.45) ; v1(-1.1,30.1) -1.1,28.075 v1(-0.975,27.95) ; v1(1.025,30.1) 1.025,28.05 v1(1.05,28.025)
  Bottom Layer w1: -45,4 -45,1.2 -45,-1.2 -45,-4 -42.5,-6.5 -35.5,-6.5 pad.2@-36.35,-5.65 ; v1(10.425,36.425) 19.075,36.425 23,32.5 23,29.2 ; 18.4,-3 19.8,-3 20.35,-3.55 HL6.3 ; HL7.3 20.35,26.55 23,29.2 ; pad.5 32.86,15.14 28.9,19.1 28.9,23.4 23.05,29.25 23,29.2
  other v1: -18.5,-19.8 -28.641,27.35 -26.325,27.375 -23.95,28.525 -24.055,31.227
  other v2: -24.3,-32.1 -13.3,-32.1 -26.5,-29.9 -13.3,-29.1 -26.5,-27.1 -13.2,-26.2 -26.4,-24.3 -18.4,-16.9 -29.668,-16.034 -26.7,-1 -23.9,34.6
NetBAT1_1: C1.1 C2.1 DA1.2 DA1.3 pad.2@-35.5,6.5 | length 11.6
  Top Layer w0.254: C2.1@-27.6,5 -26.9,5 ; DA1.3@-25.8,4.756 -26.656,4.756 -26.9,5 ; DA1.2 -26.65,5.25 -26.9,5
  Top Layer w0.5: C1.1@-30.8,5 C2.1@-27.6,5
  Top Layer w1: pad.2@-35.5,6.5 -32.3,6.5 C1.1@-30.8,5
NetC6_2: C6.2 DA2.2@-22.5,-4.3 DA2.2@-25,-4.3 DA2.3@-26.75,-4.3 DA3.2 DA6.3 pad.14 | length 54.4
  Top Layer w0.5: DA2.3@-26.75,-4.3 DA2.2@-25,-4.3 ; C6.2@-23.7,-7.6 -23.7,-6.8 -22.5,-5.6 DA2.2@-22.5,-4.3 ; DA6.3 -20.25,31.075 -18.675,31.075 -17.875,30.275 v1(-17.875,30.025)
  Top Layer w1: v1(-22.7,-1.7) -22.7,-4.1 DA2.2@-22.5,-4.3
  Bottom Layer w1: v1(-22.7,-1.7) -22.55,-1.55 -22.55,6.925 -21.1,8.375 -21.1,14.46 -19.513,16.187 -19.524,16.447 -19.527,16.52 -21.8,18.994 -21.8,26.1 v1(-17.875,30.025)
NetC13_1: C13.1 DD1.3 R12.1 VT1.3 | length 43.8
  Top Layer w0.8: DD1.3 -7.645,33.845 -5.9,32.1 v1(-5.9,31.6) ; R12.1 C13.1
  Top Layer w1: R12.1 17.325,33.3 v1(19.05,31.575) VT1.3
  Bottom Layer w0.8: v1@-5.8,31.575 v1(19.05,31.575)
NetC15_2: C15.2 DA4.3 R19.1 R20.2 | length 7.2
  Top Layer w0.5: R19.1 -5.225,-24.125 R20.2 C15.2
  Top Layer w0.7: C15.2 -0.6,-21.6 DA4.3
NetC17_1: C17.1 DA5.1 pad.15 R23.2 R24.1 Rt1.2 | length 13.6
  Top Layer w0.7: C17.1 -10.65,-17.15 R24.1 ; pad.15@-8.45,-19.225 pad.15 -8.325,-19.15 R24.1 ; DA5.1 -2.5,-17.8 -3.15,-17.15 Rt1.2 R24.1
NetC17_2: C17.2 DA5.4 R21.2 R22.1 V1.1 | length 35.3
  Top Layer w0.7: C17.2 -11.425,-11.625 -10.275,-10.475 R22.1 -2.051,-9.501 2.276,-9.501 3.3,-10.525 3.3,-13.85 1.725,-15.425 ; DA5.4 1.375,-15.425 DA5.4@1.45,-15.425 ; DA5.4@1.412,-15.463 DA5.4@1.45,-15.425 ; V1.1 7.504,-15.45 R21.2 4.7,-15.425 1.725,-15.425 ; DA5.4@1.45,-15.425 1.725,-15.425
NetC18_1: C18.1 DD2.1 R24.2 | length 8.9
  Top Layer w0.6: C18.1 -14.8,-12.8 DD2.1
  Top Layer w0.7: C18.1 -14.1,-15.05 R24.2
NetC21_1: C21.1 R25.1 VT3.1 | length 25.6
  Top Layer w0.8: C21.1 11.975,11.575 14.475,14.075 v1(17.825,14.075) ; 11.975,8.525 VT3.1 ; R25.1 13.925,23.7 15.175,22.45 v1@15.175,22.425
  Bottom Layer w0.8: v1(15.05,22.3) 15.425,22.3 17.825,19.9 v1(17.825,14.075)
NetDA1_1: DA1.1 R1.2 R2.1 | length 12.1
  Top Layer w0.25: R2.1 -27.364,13.964 -27.364,6.325 -26.789,5.75 DA1.1
  Top Layer w0.5: R1.2@-30,14 R2.1
NetDA1_7: DA1.7 DD1.8 pad.2@-15.65,3.225 R26.2 | length 43.6
  Top Layer w0.254: DA1.7 -24.15,3.242 -23.433,2.525 -18.3,2.525 v1(-18.25,2.475) -17.5,3.225 pad.2@-15.65,3.225
  Top Layer w0.8: R26.2 -12.975,25.525 v1(-11,27.5) -8.58,27.5 DD1.8
  Bottom Layer w0.8: v1(-18.25,2.475) -12.7,8.025 -12.7,25.8 v1(-11,27.5)
NetDA1_9: DA1.9 DD1.6 pad.2@-15.65,6.225 R27.2 | length 42.7
  Top Layer w0.254: DA1.9 -22.15,4.25 -21.4,3.5 -20.05,3.5 -18.325,5.225 v1(-18.275,5.225) -17.275,6.225 pad.2@-15.65,6.225
  Top Layer w0.8: R27.2 -12.95,28.15 -11.065,30.035 DD1.6
  Bottom Layer w0.8: v1(-18.275,5.225) -14.4,9.1 -14.4,27 -11.3,30.1 v1(-11.2,30.1)
NetDA1_12: DA1.12 R3.1 | length 8.7
  Top Layer w0.25: DA1.12 -22.427,5.75 -22.2,5.978 -22.2,13.6 R3.1@-22.3,13.7
NetDA1_16: DA1.16 R4.1 | length 9.3
  Top Layer w0.25: DA1.16 -25.925,6.4 -26.45,6.925 -26.45,11.3 -24.8,12.95 R4.1
NetDA4_1: DA4.1 DA4.4 DA5.3 R21.1 V1.2 | length 19.9
  Top Layer w0.5: DA4.4 -0.575,-23.125 -0.3,-22.85 1,-22.85 1.275,-22.575 1.275,-21.675 DA4.1
  Top Layer w0.7: DA4.1 1.325,-20.925 1.9,-20.35 1.9,-18.875 1.3,-18.275 DA5.3 1.575,-17.525 R21.1@4.7,-17.525 ; R21.1 7.504,-17.55 V1.2
NetDD1_7: DD1.7 R8.2 R9.1 | length 22.7
  Top Layer w0.8: R9.1 -12.425,14.875 -11.175,16.125 -11.175,16.25 ; R8.2 -12.45,17.525 -11.175,16.25 ; DD1.7 -7.59,28.765 -7.15,28.325 -7.15,18.85 -9.75,16.25 -11.175,16.25
NetDD1_9: DD1.9 R17.1 | length 20.4
  Top Layer w0.8: R17.1 -12.85,22.85 -9.475,26.225 DD1.9
  Bottom Layer w0.5: v2(-11,24.5) -9.2,26.3 -9.2,31.6 -7.6,33.2 -4,33.2
NetDD1_12: DD1.12 R18.1 S2.1 S2.2 | length 77.7
  Top Layer w0.8: R18.1 -12,20.175 -9.76,22.415 DD1.12
  Top Layer w1: v2(6.1,-10.1) v2(6.1,4.7)
  Bottom Layer w0.8: v2(-11,21.1) -10.3,21.1 v2(6.1,4.7)
  Bottom Layer w1: S2.1 S2.2 5.25,-32.95 6,-32.2 v2@6,-10.1
NetDD1_25: DD1.25 R11.1 VT2.3 | length 24.6
  Top Layer w0.8: DD1.25 10.75,17.7 17.425,17.7 19,19.275 18.875,19.275 17,21.15 17,29.5 R11.1
NetDD1_26: DD1.26 R10.2 | length 2.3
  Top Layer w0.8: DD1.26 8.595,21.125 R10.2
NetDD1_27: DD1.27 R25.2 | length 2.8
  Top Layer w0.8: DD1.27 9.465,22.415 R25.2@10.812,23.762
NetDD1_33: DD1.33 DD2.4 pad.4@-10.72,-5.95 | length 53.4
  Top Layer w0.5: DD2.4 -16.775,-9.45 -16.325,-9 v1(-15.5,-9) ; pad.4@-10.72,-5.95 -10.65,-5.95 7.25,11.95 7.25,29.275 8.01,30.035 DD1.33
  Bottom Layer w0.5: v1(-15.5,-9) -12.9,-9 -10.72,-6.82 pad.4@-10.72,-5.95
NetDD1_34: DD1.34 pad.1@37.3,4.98 | length 66
  Top Layer w0.6: v2(8.2,7.9) 8.2,4.6 17.3,-4.5 v2(22.4,-4.5)
  Top Layer w0.8: DD1.34 8.62,31.35 9.4,31.35 10.3,30.45 v1(10.3,28.9)
  Bottom Layer w0.6: v2(8.2,7.9) 8.8,7.9 10.3,9.4 v1(10.3,28.9) ; v2(22.4,-4.5) 26.9,-4.5 36.38,4.98 pad.1@37.3,4.98
NetDD1_35: DD1.35 pad.2@37.3,7.52 | length 65.4
  Top Layer w0.6: v2(10.1,4.9) 17.6,-2.6 v2(22.4,-2.6)
  Top Layer w0.8: DD1.35 10.4,32.575 11.9,31.075 v1(11.9,29.6)
  Bottom Layer w0.6: v2(10.1,4.9) 12,6.8 12,29.5 v1(11.9,29.6) ; v2(22.4,-2.6) 26.4,-2.6 36.52,7.52 pad.2@37.3,7.52
NetDD1_36: DD1.36 DD2.3 pad.3@-13.26,-5.95 | length 54.2
  Top Layer w0.5: DD2.3 -13.26,-9.36 -13.26,-5.95 -13.26,-5.335 5.8,13.725 v1(5.8,15.825) ; v1(5.7,29.9) 5.7,31.388 7.891,33.579 8.309,33.579 DD1.36
  Bottom Layer w0.5: v1(5.7,29.9) 5.7,15.925 v1(5.8,15.825)
NetHL1_1: pad.1@-12.15,3.225 R7.2 | length 13.1
  Top Layer w1: R7.2 -12.4,12.225 -9.9,9.725 -9.9,4.225 -10.9,3.225 pad.1@-12.15,3.225
NetHL2_1: pad.1@-12.15,6.225 R6.2 | length 4.5
  Top Layer w1: R6.2 -12.95,9.525 -12.15,8.725 pad.1@-12.15,6.225
NetHL3_2: HL3.2 HL7.4 | length 52.4
  Bottom Layer w0.6: HL3.2 4.1,-5.9 9.2,-0.8 25.4,-0.8 27,0.8 27,19.5 23.65,22.85 HL7.4
NetHL3_4: HL3.4 R10.1 | length 32
  Top Layer w0.6: v2(-2.4,-1) -2.4,-0.3 v2(13.9,16)
  Top Layer w0.8: R10.1 13.85,21.125 14.65,20.325 v1(14.65,19.525)
  Bottom Layer w0.6: v2(13.9,16) 14.65,16.75 v1(14.65,19.525)
  Bottom Layer w0.8: HL3.4 -2.4,-2.55 v2(-2.4,-1)
NetLS1_2: LS1.2 VD1.2 VT3.3 | length 12.4
  Top Layer w0.7: VT3.3 14.025,10.525 15.225,11.725 18.325,11.725 19.1,10.95 22.55,10.95 LS1.2
NetR13_1: R13.1 VT1.1 | length 2.2
  Top Layer w0.8: VT1.1 23.1,22.5 R13.1@23.225,22.375
NetR13_2: pad.4@37.3,12.6 R13.2 VT2.2 | length 19.5
  Top Layer w0.8: VT2.2 23.5,20.15 R13.2 24.75,20.25 32.4,12.6 pad.4@37.3,12.6
NetR14_1: R14.1 VT2.1 | length 2.6
  Top Layer w0.8: VT2.1 21,15.9 R14.1
NetR14_2: pad.3@37.3,10.06 R14.2 VT1.2 | length 46.3
  Top Layer w0.5: VT1.2 24.3,24.4 31.7,17 38.6,17 40,15.6 40,11.6 38.46,10.06 pad.3@37.3,10.06
  Top Layer w0.8: R14.2 26.1,15.7 31.74,10.06 pad.3@37.3,10.06
NetR15_2: 
NetR16_2: 
NetR22_2: pad.16 R22.2 R23.1 Rt1.1 | length 10.8
  Top Layer w0.7: pad.16 -7.95,-12.575 R22.2 -3.025,-15.025 R23.1 Rt1.1
"V ESP": C8.2 C9.2 C10.2 C11.1 DA3.3 DA6.2 DD1.2 R11.2 R12.2 R17.2 R18.2 R26.1 R27.1 | length 58.5
  Top Layer w0.8: DA6.2 -18.75,21.975 DA3.3 -18.75,25.95 -16.55,28.15 R27.1 ; R18.2 R17.2 R27.1 ; v1@-6.375,35.115 DD1.2 C10.2 -15.365,35.115 C8.2 -16.35,35.125 -17.825,33.65 -15.95,31.775 R27.1 ; v1(12,34.2) 12,34.075 12.775,33.3 R12.2 ; R11.2 R12.2@13.85,33.3
  Bottom Layer w0.8: v1(-6.375,34.925) 7.875,34.925 8.6,34.2 v1(12,34.2)
pads on no net: "Micro USB.2" "Micro USB.3" "Micro USB.4" "Micro USB.5" "Micro USB.MH1" "Micro USB.MH2" DA1.17@-24.4,5 DD1.4 DD1.5 DD1.10 DD1.11 DD1.13 DD1.14 DD1.16 DD1.17 DD1.18 DD1.19 DD1.20 DD1.21 DD1.22 DD1.23 DD1.24 DD1.28 DD1.29 DD1.30 DD1.31 DD1.32 DD1.37 HL4.2 HL4.4 HL5.2 HL5.4 HL6.2 HL6.4 HL7.2 MicroUSB.1 MicroUSB.2 MicroUSB.3 MicroUSB.4 MicroUSB.MH1 MicroUSB.MH2 MicroUSB.Shell R15.1 R16.1 S2.3 S2.4 S3.1 S3.2 S3.3 S3.4
copper on no net: | length 219.8
  Top Layer w0.8: v2@20.5,13 25.7,13 32,6.7 v2@32,-15.1
  Top Layer w1: -45,4 -45,-4 -42.3,-6.7 -37.6,-6.7
  Bottom Layer w0.5: -7.1,28.6 -4.16,28.6 -4,28.76 ; -4,33.25 4.01,33.25
  Bottom Layer w0.8: -24.45,23.65 -25.15,23.65 -32.1,16.7 -37.7,16.7 -39.3,15.1 -39.3,11.5 -37.9,10.1 -32.1,10.1 -29,7 -29,-4.7 -25.9,-7.8 -25.9,-20.4 -24.3,-22 -21.7,-22 -20.35,-20.65 -20.35,-19.55 ; -23.628,-24.45 -23.628,-27.072 -14.9,-35.8 12.5,-35.8 20.35,-27.95 20.35,-24.45 ; -8.36,-28.41 -4.41,-28.41 ; -4.41,-28.46 3.6,-28.46 ; v2@20.35,13.1 20.35,19.55 ; 23.65,-19.55 27.35,-19.55 v2(31.9,-15)
  other v2: 20.4,13

## Polygon pours and split planes (outlines as drawn)
GND on Top Layer "Polygon top" (solid, remove dead copper, pour order 2): -23.6,38.3 -20.1,38.3 -20.1,33.3 -21.287,32.113 -18.4,29.225 -18.4,18.5 -27.9,18.5 -29.6,20.2 -29.6,23.4 -31.2,25 -31.2,30.7
GND on Top Layer "Polygon top 2" (solid, remove dead copper, pour order 4): -15.745,-14.755 -15.745,-16.655 -9.9,-22.5 -9.9,-34.6 -25.2,-34.6 -29.6,-30.2 -29.6,-22.7 -29.6,-19.7 -32.2,-17.1 -36.9,-17.1 -38,-16 -38,-3 -34.8,0.2 -25.2,0.2 -24.6,-0.4 -24.6,-2.2 -25.2,-2.8 -29.6,-2.8 -29.7,-2.9 -29.7,-10 -26.4,-13.3 -17.2,-13.3
GND on Bottom Layer "Top Layer-No Net" (solid, remove dead copper, pour order 0): -25.2,-34.6 -17.8,-34.6 -24.8,-27.6 -24.8,-15.2 -26.5,-13.5 -26.5,-6 -22.147,-1.647 -22.1,-1.694 -22.1,-17.123 -20.8,-18.423 -20.8,-28.3 -14.5,-34.6 -9.9,-34.6 -9.9,-27.588 -7.912,-25.6 4.6,-25.6 4.6,-19.7 4.6,-9.3 10.4,-3.5 19.2,-3.5 20.1,-2.6 17.594,-0.094 8.908,-0.094 2.502,-6.5 -3.5,-6.5 -3.5,-1.008 -9.534,-1.008 -9.565,-0.977 -5.488,3.1 22.2,3.1 22.2,24.577 22.662,25.038 26.6,21.1 26.6,5.865 28.033,4.433 33.6,10 33.6,15.9 29.7,19.8 29.7,23.4 32.2,25.9 32.2,27.7 22.2,37.7 10,37.7 11.95,35.25 13,34.2 13,27.7 -6.2,27.7 -9.2,30.7 -9.2,31.8 -10.9,31.8 -15.179,27.521 -15.179,27.279 -17.2,29.3 -10.9,35.6 -10.9,38.3 -23.6,38.3 -31.2,30.7 -31.2,25 -29.6,23.4 -29.6,19.9 -31,18.5 -31,7.206 -30.347,7.206 -29.807,6.666 -29.807,1.1 -31,1.1 -33.7,1.1 -38,-3.2 -38,-16 -36.8,-17.123 -32.177,-17.123 -29.6,-19.7 -29.6,-30.2

## Silkscreen, mask and mechanical layers (free items; w line width, h text height)
Top Overlay:
  circle w0.254: c-20,-28 r3
  lines w0.2: -14.9,2.075 -16.6,2.075 -17.1,2.475 -17.1,3.975 -16.6,4.375 -14.9,4.375 ; -14.9,5.075 -16.6,5.075 -17.1,5.475 -17.1,6.975 -16.6,7.375 -14.9,7.375 ; -12.9,2.075 -11,2.075 -11,4.375 -12.9,4.375 ; -12.9,5.075 -11,5.075 -11,7.375 -12.9,7.375
  lines w0.254: -20.025,-30.084 ccw(c-20.025,-28.012) -20.025,-25.941
  lines w0.3: -20.025,-29.95 -20.025,-26.075
  text "XP1" at 39.3,10 h1.52
  text "XP2" at -14.775,-3.475 h1.52
  text "XP2" at 39.3,-7.5 h1.52
  text "Detecta Group" at -28.55,-34.525 h1.52
  text "XP2" at -10.375,-39.375 h1.52
  text "dAir_board v 1.1.1" at -14.2,-43 h1.52
Bottom Overlay:
  text "1" at 18.775,23.875 h1.52
  text "4" at -16.875,22.7 h1.52
  text "4" at 25.65,18.525 h1.52
  text "1" at -26.975,17.875 h1.52
  text "5V" at -29,12.8 h1.52
  text "BAT" at -27.9,5.7 h1.52
  text "4" at 3.775,-3.4 h1.52
  text "1" at -4.25,-6.825 h1.52
  text "GND" at -27.3,-7.2 h1.52
  text "GND" at -27.3,-14.5 h1.52
  text "4" at -26.25,-20.05 h1.52
  text "1" at 18.4,-20.225 h1.52
  text "4" at 26.15,-25.45 h1.52
  text "1" at -18.825,-25.775 h1.52
  text "JLCJLCJLCJLC" at 7.9,-42.9 h1.52
Mechanical 1:
  circle w1: c0,0 r46.5

## Text inside footprints (layer, text, board x,y; h text height)
"Micro USB": Mechanical 2 "PCB Edge" at -47.1,-1.2 h0.41 r270
MicroUSB: Mechanical 2 "PCB Edge" at -47.1,1.2 h0.41 r270